# EAGLE board DP-webplatformv1.1 (EAGLE 5.06)
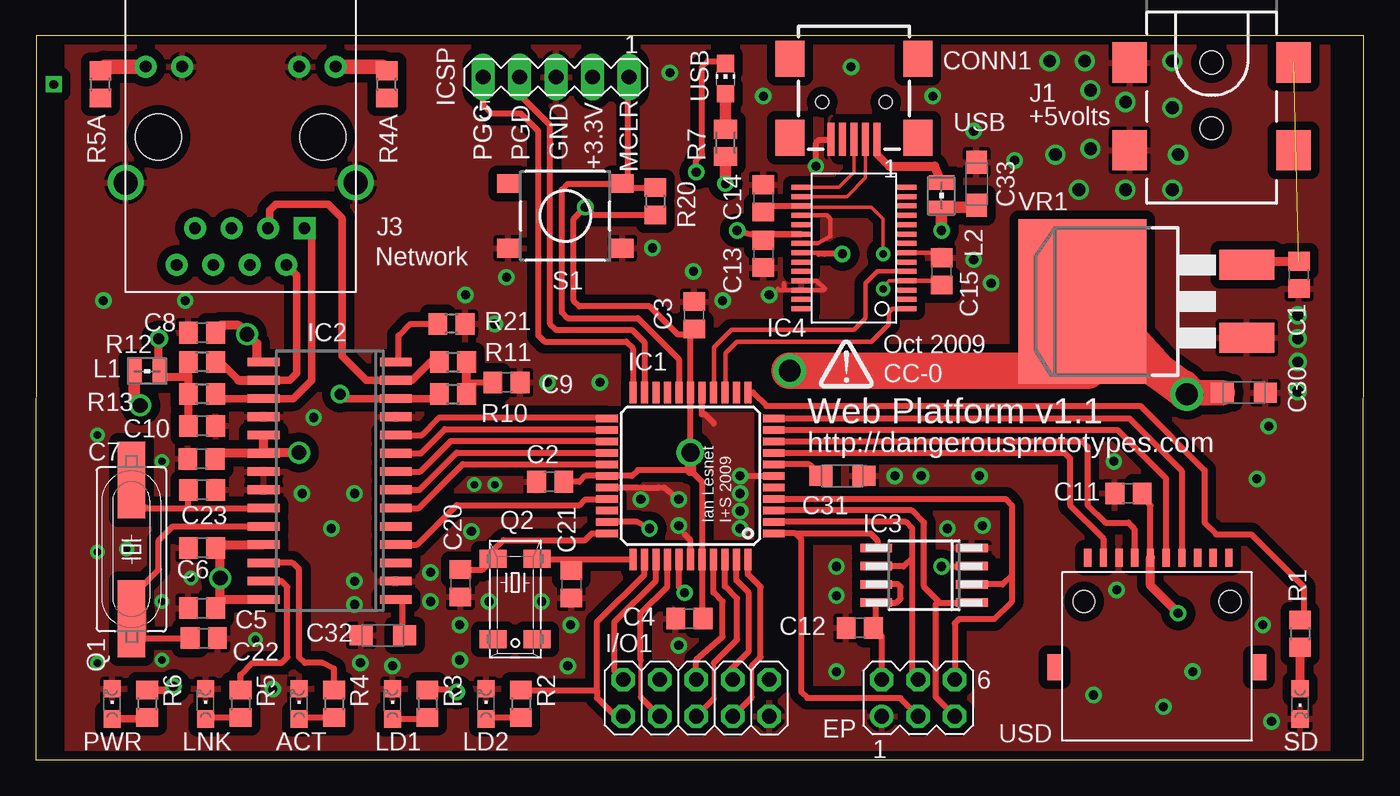
[diagram p0: board, top side]
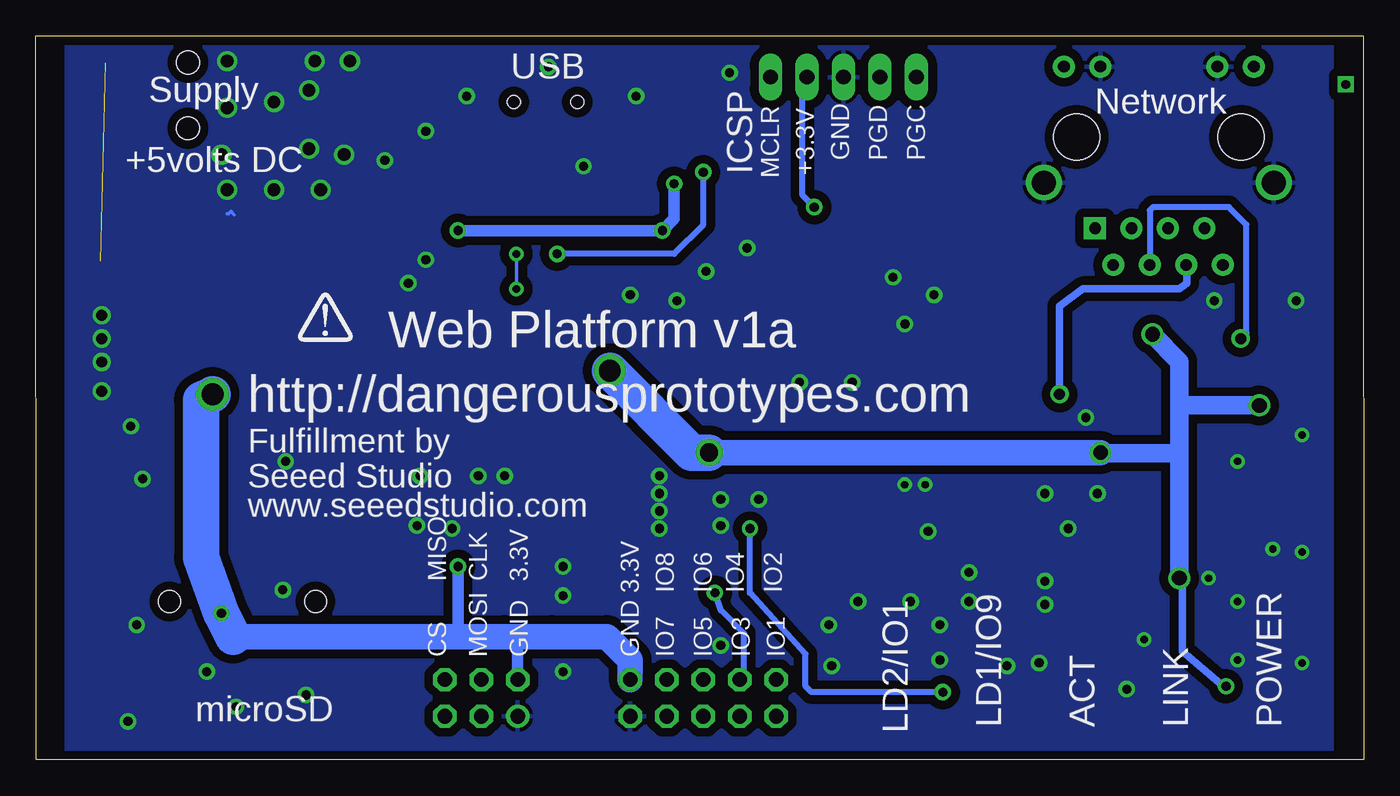
[diagram p1: board, bottom side, seen from below]

Size 92.37 x 50.33 mm. Coordinates in mm from the lower left corner, seen from the top.
Outline: 92.38,50.33 0.01,50.33 0,0 92.34,0 92.38,50.33
Copper layers (1*16): Top 0.035mm / dielectric 1.5mm / Bottom 0.035mm
Design rules "SparkFun": minimum track width 8mil, minimum drill 20mil, track to track 8mil, track to pad 8mil, pad to pad 8mil, via to via 8mil, smd to smd 8mil, copper to edge 10mil, drill to drill 8mil, minimum pad ring 12mil, minimum via ring 10mil, stop-mask expansion 4mil, vias tented up to drill 25mil, thermal gap 10mil

## Footprints (pad centres in the part's own frame; a part is rotated, then mirrored left to right if it is on the bottom)
CHIPLED_0805 = smd 1.2 x 1.2: A 0,-1.05; C 0,1.05
C0805 = smd 1.3 x 1.5: 1 -0.95,0; 2 0.95,0
SMC_A = smd 1.6 x 1.4: + -1.5,0; - 1.5,0
CONN_USB_MINI-B = smd 0.5 x 2.3: D+ 0,2.6; D- -0.8,2.6; GND 1.6,2.6; P4 0.8,2.6; VUSB -1.6,2.6 | smd 2 x 2.5: PC1 -4.45,2.5; PC2 4.45,2.5; PC3 4.45,-3; PC4 -4.45,-3 | hole 0.9: -2.2,0; 2.2,0
MA03-2 = drill 1.016 round: 1 -2.54,-1.27 | drill 1.016 octagon: 2 -2.54,1.27; 3 0,-1.27; 4 0,1.27; 5 2.54,-1.27; 6 2.54,1.27
2X05 = drill 1.016 octagon: 1 -5.08,-1.27; 2 -5.08,1.27; 3 -2.54,-1.27; 4 -2.54,1.27; 5 0,-1.27; 6 0,1.27; 7 2.54,-1.27; 8 2.54,1.27; 9 5.08,-1.27; 10 5.08,1.27
TQFP44 = smd 1.5 x 0.5: 1 -5.8,4; 2 -5.8,3.2; 3 -5.8,2.4; 4 -5.8,1.6; 5 -5.8,0.8; 6 -5.8,0; 7 -5.8,-0.8; 8 -5.8,-1.6; 9 -5.8,-2.4; 10 -5.8,-3.2; 11 -5.8,-4; 23 5.8,-4; 24 5.8,-3.2; 25 5.8,-2.4; 26 5.8,-1.6; 27 5.8,-0.8; 28 5.8,0; 29 5.8,0.8; 30 5.8,1.6; 31 5.8,2.4; 32 5.8,3.2; 33 5.8,4 | smd 0.5 x 1.5: 12 -4,-5.8; 13 -3.2,-5.8; 14 -2.4,-5.8; 15 -1.6,-5.8; 16 -0.8,-5.8; 17 0,-5.8; 18 0.8,-5.8; 19 1.6,-5.8; 20 2.4,-5.8; 21 3.2,-5.8; 22 4,-5.8; 34 4,5.8; 35 3.2,5.8; 36 2.4,5.8; 37 1.6,5.8; 38 0.8,5.8; 39 0,5.8; 40 -0.8,5.8; 41 -1.6,5.8; 42 -2.4,5.8; 43 -3.2,5.8; 44 -4,5.8
SO28W = smd 0.6 x 2.2: 1 -8.255,-4.6; 2 -6.985,-4.6; 3 -5.715,-4.6; 4 -4.445,-4.6; 5 -3.175,-4.6; 6 -1.905,-4.6; 7 -0.635,-4.6; 8 0.635,-4.6; 9 1.905,-4.6; 10 3.175,-4.6; 11 4.445,-4.6; 12 5.715,-4.6; 13 6.985,-4.6; 14 8.255,-4.6; 15 8.255,4.6; 16 6.985,4.6; 17 5.715,4.6; 18 4.445,4.6; 19 3.175,4.6; 20 1.905,4.6; 21 0.635,4.6; 22 -0.635,4.6; 23 -1.905,4.6; 24 -3.175,4.6; 25 -4.445,4.6; 26 -5.715,4.6; 27 -6.985,4.6; 28 -8.255,4.6
SO-08M = smd 0.6 x 2.2: 1 -1.905,-3.33; 2 -0.635,-3.33; 3 0.635,-3.33; 4 1.905,-3.33; 5 1.905,3.33; 6 0.635,3.33; 7 -0.635,3.33; 8 -1.905,3.33
SSOP28 = smd 0.348 x 1.397: 1 -4.225,-3.656; 2 -3.575,-3.656; 3 -2.925,-3.656; 4 -2.275,-3.656; 5 -1.625,-3.656; 6 -0.975,-3.656; 7 -0.325,-3.656; 8 0.325,-3.656; 9 0.975,-3.656; 10 1.625,-3.656; 11 2.275,-3.656; 12 2.925,-3.656; 13 3.575,-3.656; 14 4.225,-3.656; 15 4.225,3.656; 16 3.575,3.656; 17 2.925,3.656; 18 2.275,3.656; 19 1.625,3.656; 20 0.975,3.656; 21 0.325,3.656; 22 -0.325,3.656; 23 -0.975,3.656; 24 -1.625,3.656; 25 -2.275,3.656; 26 -2.925,3.656; 27 -3.575,3.656; 28 -4.225,3.656
MA05-1 = drill 1.016 long: 1 -5.08,0; 2 -2.54,0; 3 0,0; 4 2.54,0; 5 5.08,0
POWER_JACK_SMD = smd 2.8 x 2.4: GND 0,-5.7; P$4 6.1,-5.7; VIN0 0,5.7; VIN1 6.1,5.7 | hole 1.6: 0,0; 4.572,0
HR911105A = drill 0.813 pad 1.524 square: 1 4.445,-6.35 | drill 0.813 pad 1.524 round: 2 3.175,-8.89; 3 1.905,-6.35; 4 0.635,-8.89; 5 -0.635,-6.35; 6 -1.905,-8.89; 7 -3.175,-6.35; 8 -4.445,-8.89; 9 6.604,4.902; 10 4.064,4.902; 11 -4.064,4.902; 12 -6.604,4.902 | drill 1.651 pad 2.159 round: 13 8.001,-3.175; 14 -8.001,-3.175 | hole 3.2: 5.715,0; -5.715,0
WE-KI_0805_B = smd 1.02 x 1.78: 1 -0.89,0; 2 0.89,0
HC49UP = smd 5.334 x 1.93: 1 -4.826,0; 2 4.826,0
MM20SS = smd 1.27 x 1.88: 1 -2.794,-1.524; 2 2.794,-1.524; 3 2.794,1.524; 4 -2.794,1.524
R0805 = smd 1.3 x 1.5: 1 -0.95,0; 2 0.95,0
M0805 = smd 1.3 x 1.6: 1 -0.95,0; 2 0.95,0
LSH43 = smd 1.55 x 1.3: 1 -3.975,2.25; 2 3.975,2.25; 3 -3.975,-2.25; 4 3.975,-2.25
CHIP-LED0805 = smd 1.2 x 1.2: A 0,-1.05; C 0,1.05
MICROSD = smd 1.27 x 0.508: 1 0,-7.645; 2 0,-6.553; 3 0,-5.461; 4 0,-4.369; 5 0,-3.277; 6 0,-2.184; 7 0,-1.092; 8 0,0; 9 0,-8.738; 10 0,-9.83 | smd 1.778 x 1.016: RSV1 -7.62,2.286; RSV2 -7.62,-11.938 | hole 1.524: -3.048,-9.906; -3.048,0.254
D2PACK = smd 2.083 x 3.81: 1 -2.54,-8.89; 3 2.54,-8.89 | smd 11.43 x 8.89: 2 0,2.54

## Placement (x,y rotation side)
ACT  [CHIPLED_0805]  18.31,3.88 0 top
C1  0.1uF  [C0805]  87.88,33.71 270 top
C2  0.1uF  [C0805]  35.78,19.32 180 top
C3  0.1uF  [C0805]  45.79,30.91 90 top
C4  0.1uF  [C0805]  45.46,9.81 180 top
C5  0.1uF  [C0805]  11.55,10.54 180 top
C6  0.1uF  [C0805]  11.55,14.73 180 top
C7  0.1uF  [C0805]  11.52,20.91 180 top
C8  0.1uF  [C0805]  11.55,29.69 180 top
C9  0.1uF  [C0805]  32.74,26.23 0 top
C10  0.1uF  [C0805]  11.55,23.21 0 top
C11  0.1uF  [C0805]  76.02,18.51 180 top
C12  0.1uF  [C0805]  57.32,9.16 180 top
C13  0.1uF  [C0805]  50.62,35.17 270 top
C14  0.1uF  [C0805]  50.62,39.03 90 top
C15  0.1uF  [C0805]  63.01,33.95 90 top
C20  27pf  [C0805]  29.54,12.26 270 top
C21  27pf  [C0805]  37.26,12.2 270 top
C22  27pf  [C0805]  11.68,8.45 0 top
C23  27pf  [C0805]  11.55,18.77 0 top
C30  10uF  [SMC_A]  84.04,25.52 0 top
C31  10uF  [SMC_A]  56.1,19.73 0 top
C32  10uF  [SMC_A]  24.14,8.64 180 top
C33  10uF  [SMC_A]  65.45,40.05 90 top
CONN1  CONN_USB  [CONN_USB_MINI-B]  56.92,45.74 180 top
EP  [MA03-2]  61.39,4.29 0 top
I/O1  [2X05]  45.94,4.29 0 top
IC1  PIC33FJ128GP204  [TQFP44]  45.54,19.73 180 top
IC2  ENC28J60-SO  [SO28W]  20.44,19.4 90 top
IC3  25SM  [SO-08M]  61.79,12.82 90 top
IC4  FT232RL  [SSOP28]  56.92,35.58 90 top
ICSP  [MA05-1]  36.19,47.47 180 top
J1  POWER_JACKSMD  [POWER_JACK_SMD]  81.81,48.48 270 top
J3  HR911105A  [HR911105A]  14.24,43.3 0 top
L1  [WE-KI_0805_B]  7.74,27.01 0 top
L2  100mA+ ferrite bead  [WE-KI_0805_B]  63.01,39.24 90 top
LD1  [CHIPLED_0805]  24.81,3.88 0 top
LD2  [CHIPLED_0805]  31.31,3.88 0 top
LINK  [CHIPLED_0805]  11.81,3.88 0 top
PWR  [CHIPLED_0805]  5.3,3.88 0 top
Q1  25Mhz  [HC49UP]  6.65,14.63 90 top
Q2  32.768khz  [MM20SS]  33.35,11.17 270 top
R1  1K1  [R0805]  87.96,8.76 270 top
R2  1K1  [R0805]  33.75,3.88 270 top
R3  1K1  [R0805]  27.25,3.88 270 top
R4  1K1  [R0805]  20.75,3.88 270 top
R4A  1K1  [R0805]  24.4,46.96 90 top
R5  1K1  [R0805]  14.24,3.88 270 top
R5A  1K1  [R0805]  4.49,46.96 90 top
R6  1K1  [R0805]  7.74,3.88 270 top
R7  1K1  [M0805]  47.98,42.9 270 top
R10  49R9 1%  [R0805]  29.01,25.43 0 top
R11  49R9 1%  [R0805]  29.01,27.66 0 top
R12  49R9 1%  [R0805]  11.55,27.66 180 top
R13  49R9 1%  [R0805]  11.55,25.43 180 top
R20  2K  [R0805]  43.1,38.83 270 top
R21  2K32  [R0805]  28.91,30.31 180 top
S1  DTSM-6  [LSH43]  36.82,37.82 0 top
SD  [CHIPLED_0805]  87.96,3.88 180 top
U$1  [DP-LOGO]  54.48,25.83 0 top
U$2  [DP-LOGO-BOTTOM]  70.33,29.08 0 top
USB  [CHIP-LED0805]  47.98,47.37 0 top
USD  MICROSD  [MICROSD]  73.17,14.04 90 top
VR1  LD117AD2MTR  [D2PACK]  75.36,31.87 90 top

## Library data of the parts
ACT LD1 LD2 LINK PWR SD USB = led
C1-C15 C20-C23 C30-C33 R1-R4 R4A R5 R5A R6 R10-R13 R20 R21 = rcl
CONN1 IC4 U$1 = dp_devices
EP ICSP = con-lstb
I/O1 = pinhead
IC1 IC3 = microchip
IC2 = microchip-enc28j60
J1 = SparkFun
J3 = CONNECTER
L1 L2 = wuerth-elektronik
Q1 Q2 = crystal
R7 = resistor
S1 = switch-tact
U$2 = DP-logo
USD = Seeed
VR1 = v-reg

## Nets
5V+: C13.1 C33.+ IC4.20 L2.1 R7.2
$N26: CONN1.VUSB L2.2
CCT: C10.1 J3.4 L1.2 R12.2 R13.2
CTS: IC4.11
EE-CLK: EP.4 IC1.2 IC3.6
EE-CS: EP.5 IC1.3 IC3.1
EE-MISO: EP.6 IC1.4 IC3.2
EE-MOSI: EP.3 IC1.1 IC3.5
ETH-CLK: IC1.25 IC2.8
ETH-CS: IC1.24 IC2.9
ETH-INT: IC1.30 IC2.4
ETH-MISO: IC1.27 IC2.6
ETH-MOSI: IC1.26 IC2.7
ETH-RST: IC1.23 IC2.10
GND: ACT.C C1.2 C2.2 C3.2 C4.2 C5.2 C6.2 C7.2 C8.2 C9.2 C10.2 C11.2 C12.2 C13.2 C14.2 C15.2 C20.2 C21.2 C22.2 C23.2 C30.- C31.- C32.- C33.- CONN1.GND EP.1 I/O1.9 IC1.6 IC1.16 IC1.29 IC1.39 IC2.2 IC2.11 IC2.18 IC2.21 IC2.22 IC3.4 IC4.7 IC4.18 IC4.21 IC4.25 IC4.26 ICSP.3 J1.GND J1.P$4 J3.10 J3.11 J3.13 J3.14 LD1.C LD2.C LINK.C PWR.C R21.1 S1.3 S1.4 SD.C USD.6 VR1.1
LED1: IC1.32 R3.1
LED_A: IC2.27 R5.1
LED_A2: R5A.1
LED_B: IC2.26 R4.1
LED_B2: R4A.1
LED_LINK: J3.9 R4A.2
LED_STATUS: J3.12 R5A.2
MCLR: IC1.18 ICSP.1 R20.1 S1.2
N$5: C20.1 IC1.33 Q2.1
N$6: C32.+ IC2.1
N$7: IC2.14 R21.2
N$9: C22.1 IC2.24 Q1.1
N$10: R7.1 USB.A
N$11: R1.2 SD.A
N$12: C23.1 IC2.23 Q1.2
N$13: LD2.A R2.2
N$14: LINK.A R5.2
N$15: CONN1.D+ IC4.15
N$16: CONN1.D- IC4.16
N$17: C14.1 C15.1 IC4.4 IC4.17
N$18: C31.+ IC1.7
N$19: C21.1 IC1.34 Q2.4
N$20: ACT.A R4.2
N$22: C9.1 R10.2 R11.2
N$25: USD.8
N$26: IC1.31
N$28: LD1.A R3.2
N$29: PWR.A R6.2
N$34: USD.1
PGC: IC1.22 ICSP.5
PGD: IC1.21 ICSP.4
RA9: I/O1.1 IC1.35 R2.1
RB5: I/O1.6 IC1.41
RB6: I/O1.5 IC1.42
RB7: I/O1.8 IC1.43
RB8: I/O1.7 IC1.44
RC3: I/O1.2 IC1.36
RC4: I/O1.3 IC1.37
RC5: I/O1.4 IC1.38
RD+: IC2.13 J3.3 R11.1
RD-: IC2.12 J3.6 R10.1
RTS: IC4.3
RX: IC1.15 IC4.5
RXLED: IC4.22 USB.C
SDCLK: IC1.9 USD.5
SDCS: IC1.11 USD.2
SDLED: IC1.12 R1.1
SDMISO: IC1.8 USD.7
SDMOSI: IC1.10 USD.3
TD+: IC2.17 J3.1 R13.1
TD-: IC2.16 J3.2 R12.1
TX: IC1.14 IC4.1
V+: C2.1 C3.1 C4.1 C5.1 C6.1 C7.1 C8.1 C11.1 C12.1 C30.+ EP.2 I/O1.10 IC1.17 IC1.28 IC1.40 IC2.15 IC2.19 IC2.20 IC2.25 IC2.28 IC3.3 IC3.7 IC3.8 ICSP.2 L1.1 R6.1 R20.2 USD.4 VR1.2
VBAT: C1.1 J1.VIN0 VR1.3

## Tracks (layer width: path | path; a pad name or v marks a point on that pad's centre or on a via)
5V+  (via drill 0.64)
  Top 0.406: C13.1 51.12,36.56 IC4.20 49.76,36.56 v48.79,36.8
  Top 0.813: v63.01,36.8 L2.1 63.09,38.43 65.04,38.43 65.45,38.83 C33.+ | v47.98,40.05 R7.2
  Bottom 0.813: v63.01,36.8 v48.79,36.8 47.98,37.61 v47.98,40.05
$N26
  Top 0.406: 58.52,42.11 CONN1.VUSB
  Top 0.508: 58.52,42.11 59.35,41.27
  Top 0.61: 59.35,41.27 62.53,41.27 L2.2
CCT  (via drill 0.76)
  Top 0.406: R13.2 10.92,25.12 10.7,24.9
  Top 0.559: 8.55,27.86 v8.55,29.28 | 8.55,27.86 8.55,26.68 L1.2 | C10.1 R13.2 10.6,26.64 | 10.6,26.64 R12.2 | 8.55,27.86 8.55,26.64 10.6,26.64
  Bottom 0.406: J3.4 14.88,38.2 14.65,38.43 9.37,38.43 8.15,37.21 8.15,29.69 v8.55,29.28
EE-CLK
  Top 0.406: IC1.2 60.52,16.53 60.98,16.07 60.98,14.04 | EP.4 61.39,5.51 60.98,5.91 60.98,14.04 | 60.98,14.04 60.37,13.43 58.49,13.43 IC3.6
EE-CS
  Top 0.406: 62.89,10.92 IC3.1 | 62.89,10.92 61.79,12.01 61.79,16.48 60.94,17.33 IC1.3 | 63.98,3.07 EP.5 62.61,4.34 62.61,10.79 62.73,10.92 62.89,10.92
EE-MISO
  Top 0.406: IC3.2 67.25,12.19 67.89,12.82 | 67.89,12.82 67.89,17.7 67.48,18.13 IC1.4 | EP.6 63.93,9.47 64.23,9.77 66.67,9.77 67.89,10.99 67.89,12.82
EE-MOSI
  Top 0.406: IC3.5 58.42,14.73 58.54,14.85 58.54,15.26 58.07,15.73 52.85,15.73 | 52.85,15.73 IC1.1 | EP.3 60.17,4.24 60.17,4.29 53.67,4.29 53.26,4.69 53.26,15.32 52.85,15.73
ETH-CLK
  Top 0.406: IC2.8 26.74,20.04 28.87,22.17 39.7,22.17 IC1.25
ETH-CS
  Top 0.406: IC2.9 26.79,21.31 28.47,22.98 39.69,22.98 IC1.24
ETH-INT
  Top 0.406: IC2.4 26.54,14.96 29.28,17.7 37.82,17.7 38.22,18.11 39.71,18.11 IC1.30
ETH-MISO
  Top 0.406: IC2.6 26.64,17.5 29.69,20.54 39.72,20.54 IC1.27
ETH-MOSI
  Top 0.406: IC2.7 26.69,18.77 29.28,21.36 39.71,21.36 IC1.26
ETH-RST
  Top 0.406: IC2.10 26.84,22.58 28.06,23.8 39.67,23.8 IC1.23
GND  (via drill 0.51, 0.64, 0.76, 0.89)
  Top 0.305: IC4.7 62.96,35.26 C15.2 | 52.04,32.66 IC4.26 54.8,32.66 54.88,32.74 54.31,33.31 IC4.25 | 52.04,32.66 51.71,32.66 51.63,32.74 | 52.04,32.66 52.04,33.14 | IC4.18 55.05,37.86 55.29,37.61 55.29,36.39 54.4,35.91 IC4.21
  Top 0.406: 49.19,19.73 IC1.6 | v44.72,18.11 43.7,18.93 43.3,18.92 42.29,18.92 41.89,18.93 IC1.29 | IC1.16 46.34,24.01 46.54,24.01 47.16,23.39 | IC1.39 45.54,15.26 45.13,15.67 | v54.27,41.27 54.27,42.9 54.48,43.1 55.27,43.1 CONN1.GND
  Bottom 0.254: 79.05,37.95 79.07,37.97 78.97,37.97 78.8,38.13 78.8,38.12 78.57,37.89
  other vias: 73.38,42.49 75.81,45.74 75.81,39.64 10.38,31.92 19.32,23.79 18.51,18.51 22.17,18.51 8.76,20.75 10.79,12.62 15.26,8.35 4.69,31.92 48.99,19.73 44.72,7.95 75,20.75 84.96,19.53 48.99,17.29 51.02,32.33 8.76,6.93 73.58,4.49 78.46,3.68 85.36,9.37 80.49,6.12 66.47,33.14 72.56,39.64 79.07,39.64 79.47,42.08 79.07,45.33 70.94,42.08 73.38,46.55 72.97,48.59 70.53,48.59 79.07,48.59 75.2,11.81 55.7,11.4 63.42,16.07 65.86,16.28 61.59,19.73 59.76,19.73 55.7,13.43 35.58,26.23 29.89,32.33 31.92,30.3 30.3,15.87 31.92,19.12 30.5,19.12 27.45,10.99 27.45,13.03 31.52,10.99 37.21,9.37 35.17,10.99 29.48,9.37 37,6.52 24.81,6.52 16.48,4.9 6.32,14.65 65.25,34.77 65.25,43.71 68.09,41.68 50.62,46.15 56.71,48.18 62.4,46.15 42.9,35.58 32.74,33.55 55.7,6.12 65.65,19.73 85.97,2.66 87.8,25.62 87.8,29.28 85.77,23.19 87.8,27.66 87.8,30.91 45.74,33.95 47.77,31.92 42.08,18.11 39.24,26.23 8.76,10.99 29.48,6.93 20.54,16.07 22.17,12.42 22.17,10.79 22.58,6.73 44.72,16.28 4.29,6.73 4.29,14.45 4.29,22.58 44.11,47.77 48.99,18.51 48.99,16.07
  pour Top (isolate 0.61): 89.83,-0.18 2.2,-0.18 2.2,49.65 89.83,49.65
  pour Bottom (isolate 0.61): 90.24,-0.23 2.2,-0.23 2.2,49.65 90.24,49.65
LED1  (via drill 0.64)
  Top 0.406: IC1.32 41.83,16.53 v42.69,16.07 | v29.28,4.69 29.28,4.9 28,4.9 R3.1
  Bottom 0.406: v42.69,16.07 42.69,11.6 38.83,7.34 38.83,5.1 38.43,4.69 v29.28,4.69
LED_A
  Top 0.406: IC2.27 17.09,12.42 17.5,12.01 17.5,7.13 17.09,6.73 15.06,6.73 14.24,5.91 R5.1
LED_B
  Top 0.406: IC2.26 17.85,13.69 18.31,13.23 18.31,7.13 18.71,6.73 19.93,6.73 20.75,6.32 R4.1
LED_LINK
  Top 1.016: J3.9 24.11,48.2 R4A.2
LED_STATUS
  Top 1.016: J3.12 4.79,48.2 R5A.2
MCLR
  Top 0.406: 41.27,40.25 41.08,40.07 S1.2 41.08,39.78 R20.1 | ICSP.1 41.2,47.4 41.2,40.32 41.27,40.25 | IC1.18 44.74,27.85 41.88,30.7 37,30.7 36.6,31.11 36.6,39.64 37,40.05 41.07,40.05 41.27,40.25
N$1  (via drill 0.6)
  other vias: 1.24,46.96
N$5
  Top 0.406: IC1.33 38.69,15.73 38.22,15.26 32.53,15.26 31.82,14.55 Q2.1 31.07,13.21 C20.1
N$6
  Top 0.406: IC2.1 25.52,11.15 25.52,8.95 C32.+
N$7
  Top 0.406: R21.2 26.04,30.31 25.22,29.48 25.22,27.83 IC2.14
N$9
  Top 0.406: 7.46,8.61 7.46,10.51 7.3,10.37 | 7.3,10.37 Q1.1 6.65,8.35 | 6.65,8.35 6.65,8.05 6.37,8.34 6.32,8.65 6.46,8.48 | C22.1 6.75,8.45 6.65,8.35 | IC2.24 9.52,16.23 8.55,15.26 8.55,13.23 6.93,11.6 6.93,10.74 7.3,10.37
N$10
  Top 0.813: R7.1 USB.A
N$11
  Top 0.61: SD.A R1.2
N$12
  Top 0.406: Q1.2 6.48,18.13 | 6.48,18.13 7.28,18.26 | 6.48,18.13 7.64,17.53 7.23,17.5 10.59,17.5 | 10.59,17.5 IC2.23 | C23.1 10.6,17.51 10.59,17.5
N$13
  Top 0.406: R2.2 31.01,2.93 LD2.A
N$14
  Top 0.406: R5.2 11.91,2.93 LINK.A
N$15
  Top 0.254: IC4.15 55.86,39.81 56.92,40.86 CONN1.D+
N$16
  Top 0.254: IC4.16 56.43,39.16 57.73,40.46 57.73,43.23 57.72,43.22 CONN1.D-
N$17  (via drill 0.51)
  Top 0.254: IC4.4 59.35,33.31 v58.95,32.74 | v58.95,35.17 58.95,37.61 58.14,38.43 53.34,38.43 IC4.17
  Top 0.305: IC4.4 62.91,33.31 C15.1
  Top 0.406: IC4.17 51.04,38.51 C14.1
  Bottom 0.254: v58.95,35.17 v58.95,32.74
N$18
  Top 0.406: 54.07,20.14 C31.+ 53.8,20.53 IC1.7
N$19
  Top 0.406: 37.82,13.23 37.34,13.23 C21.1 37.26,13.68 37,13.93 | 37,13.93 34.9,13.93 Q2.4 | 37,13.93 IC1.34
N$20
  Top 0.406: R4.2 18.41,2.93 ACT.A
  Top 0.61: ACT.A 18.41,2.83
N$22
  Top 0.406: R10.2 | 29.97,27.34 R11.2 | C9.1 29.97,26.23 29.97,26.2
  Top 0.61: R10.2 29.97,26.2 29.97,27.34
N$28
  Top 0.406: LD1.A 27.15,2.83 R3.2
N$29
  Top 0.508: PWR.A 7.64,2.83 R6.2
PGC
  Top 0.406: ICSP.5 31.11,45.54 31.72,44.93 33.75,44.93 34.97,43.71 34.97,29.48 35.38,29.08 41.07,29.08 41.54,28.61 IC1.22
PGD
  Top 0.406: IC1.21 42.34,29.03 41.47,29.89 36.19,29.89 35.78,30.3 35.78,44.12 33.75,46.15 33.75,47.37 ICSP.4
RA9
  Top 0.406: I/O1.1 40.81,3.07 40.25,3.07 39.03,4.29 39.03,4.69 | 39.03,4.69 39.03,9.57 42.34,12.87 IC1.35 | R2.1 39.03,4.83 39.03,4.69
RB5
  Top 0.406: IC1.41 47.14,11.63 47.77,10.99 47.77,8.56 45.94,6.93 I/O1.6
RB6
  Top 0.305: 47.16,4.24 47.16,6.73
  Top 0.406: IC1.42 47.94,12.05 48.79,11.2 48.79,8.35 47.16,6.73 | I/O1.5 47.16,4.24
RB7
  Top 0.406: IC1.43 48.74,12.47 49.6,11.6 49.6,7.54 48.38,6.32 48.38,5.66 I/O1.8
RB8
  Top 0.305: 49.8,4.34 49.8,6.52
  Top 0.406: 48.48,2.56 I/O1.7 49.8,4.34 | IC1.44 49.54,12.89 50.41,12.01 50.41,7.13 49.8,6.52
RC3
  Top 0.406: IC1.36 43.14,12.45 40.25,9.57 40.25,6.17 I/O1.2
RC4
  Top 0.305: 42.08,4.34 42.08,6.93
  Top 0.406: IC1.37 43.94,12.04 42.08,10.18 42.08,6.93 | 42.08,4.34 I/O1.3
RC5  (via drill 0.64)
  Top 0.406: IC1.38 44.74,12 v45.13,11.6
  Bottom 0.406: v45.13,11.6 44.72,10.38 43.1,8.76 43.1,5.86 I/O1.4
RD+
  Top 0.406: 24.92,26.37 24.93,26.39 IC2.13
  Top 0.508: R11.1 27.45,27.66 26.17,26.37 24.92,26.37 | 24.93,26.39 22.98,26.39 21.31,28.06 21.31,37.66 20.34,38.63 16.68,38.63 16.28,38.22 16.28,37.08 J3.3
RD-  (via drill 0.76)
  Top 0.406: 27.74,25.12 27.75,25.12 R10.1
  Top 0.508: 27.74,25.12 IC2.12 21.46,25.12 v21.15,25.42
  Bottom 0.406: 12.31,34.49 J3.6
  Bottom 0.508: v21.15,25.42 21.15,31.52 19.53,32.74 12.82,32.74 12.31,33.14 12.31,34.49
RX
  Top 0.305: IC4.5 58.54,33.96 57.73,33.14 57.73,30.7 56.92,29.89 48.38,29.89 47.16,28.67 47.16,25.56 IC1.15
RXLED  (via drill 0.64)
  Top 0.305: IC4.22 54.8,35.26 54.88,35.17
  Top 0.406: v45.94,40.86 45.94,41.68 46.35,42.08 46.35,48.18 46.76,48.59 47.81,48.59 USB.C | v56.1,35.17 54.88,35.17 54.48,35.17
  Bottom 0.406: v45.94,40.86 45.94,37.21 47.98,35.17 v56.1,35.17
SDCLK
  Top 0.406: IC1.9 72.8,22.13 73.17,21.76 73.17,17.7 74.39,16.48 76.02,16.48 76.42,16.07 76.42,14.07 USD.5
SDCS
  Top 0.406: USD.2 79.73,20.09 76.08,23.73 IC1.11
SDLED
  Top 0.406: IC1.12 49.9,25.53 50.82,24.61 76.83,24.61 81.3,20.14 81.3,16.48 82.11,15.67 84.55,15.67 88.21,12.01 88.21,9.96 R1.1
SDMISO
  Top 0.406: USD.7 74.26,15.39 71.95,17.7 71.95,20.95 71.55,21.36 68.3,21.36 67.48,21.36 51.36,21.36 IC1.8
SDMOSI
  Top 0.406: USD.3 78.63,19.55 75.26,22.93 IC1.10
TD+
  Top 0.406: R13.1
  Top 0.508: R13.1 12.82,25.12 IC2.17 17.9,25.12 19.17,26.39 19.17,36.47 J3.1
TD-
  Top 0.508: IC2.16 17.64,26.39 18.14,26.88 18.14,33.69 J3.2 | R12.1 12.82,27.66 14.09,26.39
  Top 0.61: 14.09,26.39 IC2.16
TX
  Top 0.305: IC4.1 59.6,31.36 59.35,31.11 59.35,30.3 58.14,29.08 48.79,29.08 47.98,28.27 47.98,25.57 IC1.14
V+  (via drill 0.64, 1.02, 1.27, 1.52)
  Top 0.406: 12.82,14.96 C6.1 | 15.36,27.66 IC2.15 | 14.67,29.57 v14.69,29.58 14.69,29.56 14.72,29.56 | 12.5,29.75 C8.1 12.45,29.75 | C5.1 12.82,11.15 v12.82,12.62 | 12.82,30.2 12.82,30.12 | 15.73,21.31 15.73,21.3 | 15.73,21.31 IC2.20 15.84,21.36 | 15.73,21.31 15.84,21.42 | 12.59,21.31 12.57,21.28 12.57,21.05 12.44,20.92 12.45,20.91 C7.1 | ICSP.2 38.63,47.37 | v45.54,21.36 IC1.17 45.54,29.48 | C4.1 46.34,10.09 IC1.40 46.34,19.34 45.54,20.14 41.88,20.14 41.47,19.73 IC1.28 38.22,19.73 37.82,19.32 C2.1 | 73.99,31.52 71.68,33.01 | 73.17,27.05 73.31,26.91 | 45.54,29.48 45.54,29.7 C3.1 | USD.4 77.54,17.66 C11.1 | IC3.7 59.99,12.19 60.17,12.01 60.17,11.2 59.89,10.92 IC3.8 | IC3.3 64.87,13.46 v63.01,13.43 | IC3.8 58.39,10.99 | EP.2 58.85,8.59 C12.1 58.46,9.36 IC3.8 | 45.54,29.48 45.47,29.55 44.66,29.55 42.69,31.52 37.82,31.52 37.41,31.92 37.41,37.61 v38.22,38.43 38.77,37.88 R20.2
  Top 0.508: R6.1 9.1,4.83 v9.57,5.1
  Top 0.61: IC2.25 12.82,14.96 v12.82,12.62 | IC2.28 12.82,11.15 12.82,12.42 | 12.5,29.75 12.32,29.92 | 15.36,27.66 15.36,28.93 14.72,29.56 14.09,30.2 12.82,30.2 | 12.82,30.12 12.45,29.75 | 15.84,21.42 IC2.19 | IC2.20 12.59,21.31 | v18.31,21.36 15.84,21.36 | USD.4 77.54,12.11 v79.47,10.18
  Top 0.813: v45.54,21.36 45.54,20.14 | L1.1 6.85,25.04 v7.26,24.63
  Top 1.778: 73.99,31.52 VR1.2 | 73.17,27.05 78.05,27.05 | 79.57,25.93 80.08,25.52 80.39,25.52 v80.08,25.42 80.59,25.52 C30.+
  Top 2.54: 79.57,25.93 78.05,27.05 73.99,31.52 | 80.08,25.52 79.75,25.86 | v52.45,27.05 73.17,27.05
  Bottom 0.406: 12.86,21.34 12.85,21.34 12.82,21.31 | 12.82,22.24 12.83,22.24 12.79,24.63 | 17.9,21.31 v18.31,21.36 | v38.22,38.43 39.03,39.24 39.03,47.16 ICSP.2 | 59.76,8.56 63.01,8.76 62.61,8.56
  Bottom 0.508: v9.57,5.1 9.77,5.1 12.62,7.54 12.62,12.42 v12.82,12.62
  Bottom 0.813: EP.2 58.85,8.45 56.51,8.56 | 63.01,8.76 v63.01,13.43
  Bottom 1.27: v12.82,12.62 12.82,21.31 | 12.82,21.31 12.82,22.24 12.82,27.68 v14.69,29.58 | 12.79,24.63 v7.26,24.63 | 12.82,21.31 17.9,21.31
  Bottom 1.778: v18.31,21.36 v45.54,21.36 | I/O1.10 51.02,6.93 52.65,8.56 56.51,8.56 59.76,8.56 78.66,8.56
  Bottom 2.54: v52.45,27.05 46.76,21.36 v45.54,21.36 | v80.08,25.42 80.89,25.01 80.89,14.04 v79.47,10.18 78.66,8.56
VBAT  (1 unrouted)
  Top 0.61: C1.1 84.5,34.66 VR1.3
  Top 1.778: VR1.3 84.26,34.42

## Text on the board
tNames: USB | J1 | USB | +5volts | PGC | PGC | PGD | GND | +3.3V | MCLR | Network | Oct 2009 | CC-0 | Web Platform v1.1 | http://dangerousprototypes.com | Ian Lesnet | I+S 2009 | PWR | LNK | ACT | LD1 | LD2 | SD
bNames: USB | ICSP | Supply | Network | PGC | PGD | GND | +3.3V | MCLR | +5volts DC | Web Platform v1a | http://dangerousprototypes.com | Fulfillment by | Seeed Studio | www.seeedstudio.com | 3.3V | CLK | MISO | IO2 | IO4 | IO6 | IO8 | 3.3V | IO1 | IO3 | IO5 | IO7 | GND | GND | MOSI | CS | microSD | POWER | LINK | ACT | LD1/IO9 | LD2/IO1
tValues: RA0 | RA1 | GND | V+ | GND | RB15 | MCLR | V+ | GND | PGD3 | PGC3
Reference: ICSP | Supply | Network | +5volts DC | USB | PGC | PGD | GND | MCLR | +3.3V | WEB PLATFORM | CC-0 | Ian Lesnet 2009 | http://dangerousprototypes.com | microSD | Indicator LEDs